# Altium PCB USB-A to 7.4V.PcbDoc
Units mm, origin at the board's own origin, x right, y up, seen from the top; angles counter-clockwise.
Board outline 28.2 x 11.9 mm, 2 copper layers (Top Layer, Bottom Layer); 9 components, 5 nets, 49 pads, 29 vias.
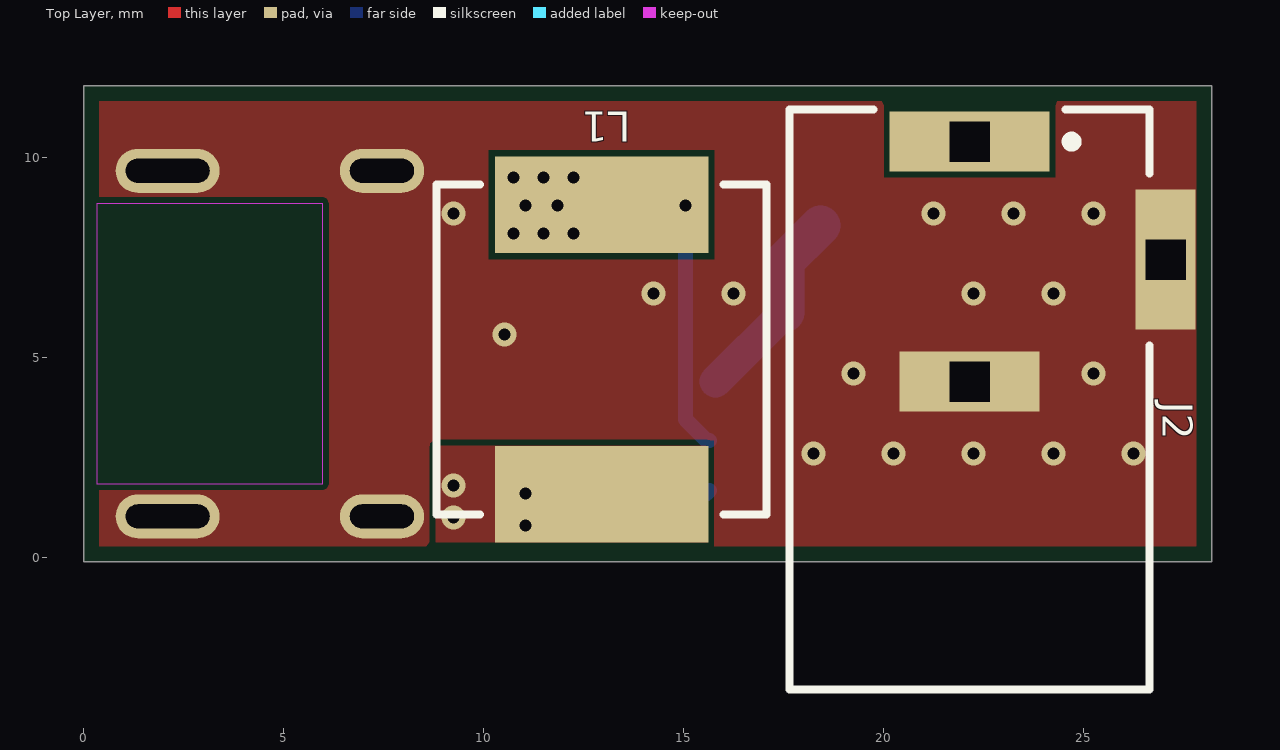
[diagram p0: Top Layer view]
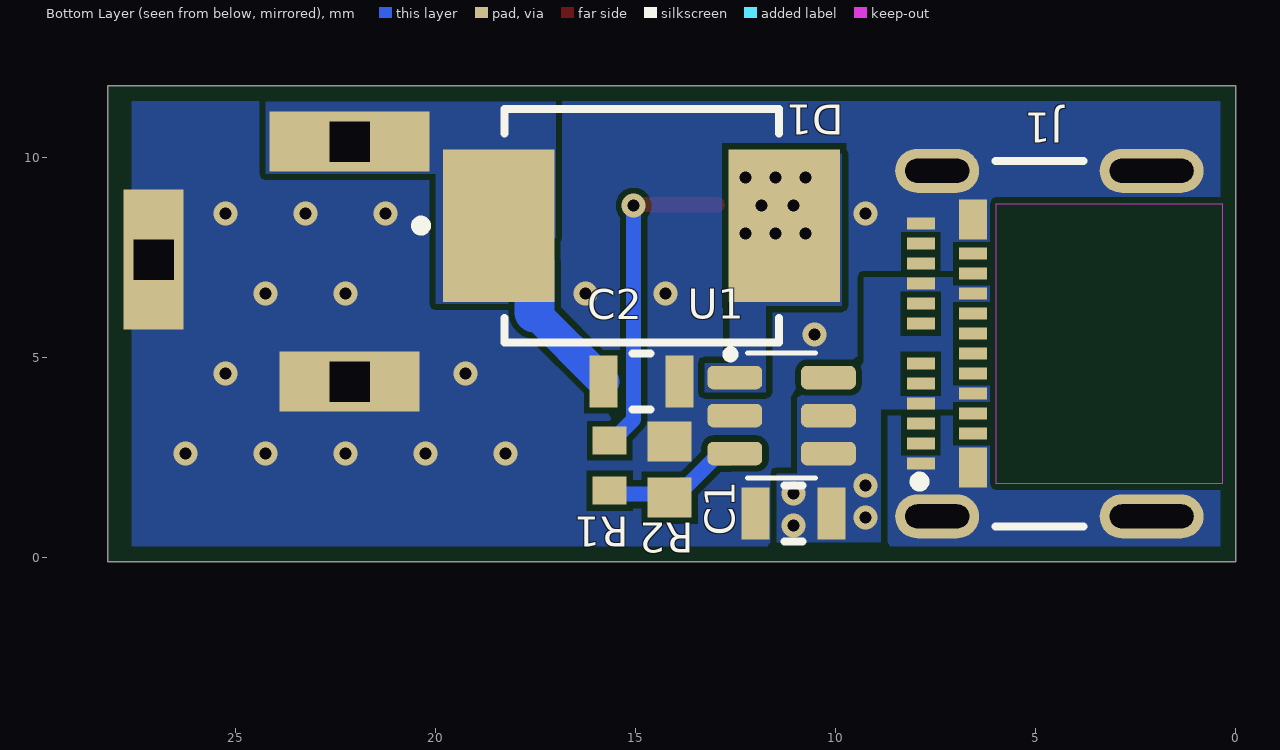
[diagram p1: Bottom Layer view, seen from below]

## Layer stack, top to bottom
Top Solder: solder mask 0.0102, Solder Resist, Dk 3.5
Top Layer: signal copper 0.0356
Dielectric 1: dielectric 0.32, FR-4, Dk 4.8
Bottom Layer: signal copper 0.0356
Bottom Solder: solder mask 0.0102, Solder Resist, Dk 3.5

## Board outline
0,-0.1 0,11.8 28.2,11.8 28.2,-0.1

## Design rules (kind name [scope] priority, off if disabled: settings)
BoardOutlineClearance [All] p1: gap=0.381 ignorepadtopadclearanceinfootprint=FALSE
Clearance [All] p1: gap=0.152 ignorepadtopadclearanceinfootprint=FALSE except(0: Arc-Hole Track-Hole SMDPad-Hole THPad-Hole Via-Hole Fill-Hole Poly-Hole Region-Hole Text-Hole)
ComponentClearance [All] p1: gap=0.025 collisioncheckmode=3 verticalgap=0.025 showdistances=FALSE
DiffPairsRouting [All] p1: maxlimit=10 minlimit=0.152 mostfreqgap=0.203 toplayer_minwidth=0.152 toplayer_maxwidth=0.381 toplayer_prefwidth=0.203 bottomlayer_minwidth=0.152 bottomlayer_maxwidth=0.381 bottomlayer_prefwidth=0.203 maxuncoupledlength=12.7
HoleSize [All] p1: absolutevalues=TRUE maxlimit=6.731 minlimit=0.3 maxpercent=80.000 minpercent=20.000
HoleToHoleClearance [All] p1: gap=0.254 allowstackedmicrovias=FALSE
MinimumAnnularRing [All] p1: minimumring=0.127
MinimumSolderMaskSliver [All] p1: minsoldermaskwidth=0
PlaneClearance [All] p1: clearance=0.254
PlaneConnect [All] p1: planeconnectstyle=Direct reliefexpansion=0.406 reliefentries=4 reliefconductorwidth=0.152 reliefairgap=0.152
PolygonConnect PolygonConnect_1 [All] p1: connectstyle=Direct reliefconductorwidth=0.254 reliefentries=4 polygonreliefangle="90 Angle" airgapwidth=0.254
RoutingCorners [All] p1: cornerstyle=45-Degree minsetback=1.25 maxsetback=1.25
RoutingVias [All] p1: holewidth=0.381 width=0.762 viastyle="Through Hole" minholewidth=0.3 minwidth=0.6 maxholewidth=2.54 maxwidth=2.896
SilkToSilkClearance [All] p1: silktosilkclearance=0
SilkToSolderMaskClearance [IsPad] p1: minsilkscreentomaskgap=0.152 clearancetoexposedcopper=TRUE
SolderMaskExpansion [All] p1: expansion=0.075 istentingtop=FALSE
Width [All] p1: maxlimit=10.16 minlimit=0.152 preferedwidth=0.203
20 further rules are at their usual default settings.

## Components (designator, comment, footprint, x,y, rotation, side; value= is the part's Value field where it differs from the comment)
C1 "GRM21BR60J226ME39L" FP-GRM21B-0_15-MFG 11.05,1.1 r0 bottom
C2 "GRM21BR60J226ME39L" FP-GRM21B-0_15-MFG 14.85,4.4 r180 bottom
D1 "MBRS4201T3G" ONSC-SMC-2-403-03_V 14.85,8.3 r180 bottom
J1 "1054500101" FP-1054500101-MFG 4.1,5.35 r90 bottom
J2 "NEB 21 R" LUMB-NEB21R_V 22.15,3.95 r0 top
L1 "IHLP3232DZER220M11" FP-IHLP-3232DZ-FP_2_413x5-MFG 12.95,5.2 r90 top
R1 "ERJ3EKF1802V" RESC1608X55X30LL15T15 15.65,2.3 r90 bottom value=18k
R2 "ERA3AEB162V" RESC1608X55X30ML20T20 14.15,2.2 r270 bottom value=1.6k
U1 "MT3608" SOT95P280X145-6N 11.35,3.55 r180 bottom

## Footprints (in the part's own frame and the unit in brackets; to place one, negate y for a bottom-side part, rotate by r counter-clockwise, add the part's x,y. Pads: shape width x height; smd on the part's side, far side on the other; paste and mask are expansions set on the pad)
FP-1054500101-MFG [mm]
  rrect100% 1.1x2.1 hole 1.6 slot 0.6 at 0 deg paste-1000 mask+0: 1(-4.32,3.36) 2(4.32,3.36)
  rrect100% 1.1x2.6 hole 2.1 slot 0.6 at 0 deg paste-1000 mask+0: 3(-4.32,-2) 4(4.32,-2)
  rect 0.3x0.7 smd paste+0 mask+0: A1(-3,3.77) A2(-2.5,3.77) A3(-2,3.77) A4(-1.5,3.77) A5(-1,3.77) A6(-0.5,3.77) A7(0.5,3.77) A8(1,3.77) A9(1.5,3.77) A10(2,3.77) A11(2.5,3.77) A12(3,3.77) B2(2.25,2.47) B3(1.75,2.47) B4(1.25,2.47) B5(0.75,2.47) B6(0.25,2.47) B7(-0.25,2.47) B8(-0.75,2.47) B9(-1.25,2.47) B10(-1.75,2.47) B11(-2.25,2.47)
  rect 1x0.7 smd paste+0 mask+0: B1(3.1,2.47) B12(-3.1,2.47)
  Keep-Out Layer region: -3.5,1.88 3.5,1.88 3.5,-3.77 -3.5,-3.77
  silkscreen extent -4.57,-0.3 4.57,3.93
FP-GRM21B-0_15-MFG [mm]
  rect 0.7x1.3 smd paste+0 mask+0: 1(-0.95,0) 2(0.95,0)
  silkscreen extent -0.23,-0.7 0.23,0.7, body extent -1,-0.63 1,0.63, height 1.4
FP-IHLP-3232DZ-FP_2_413x5-MFG [mil]
  rect 95x210 smd paste+0 mask+0: 1(-142.5,0) 2(142.5,0)
  silkscreen extent -163,-163 163,163, body extent -194,-166 194,166, height 10
LUMB-NEB21R_V [mm] "THD, 3-Leads, Body 14.5x9mm"
  rect 4x1.5 hole 1 square: 1(0,6.45)
  rect 1.5x3.5 hole 1 square: 2(4.9,3.5)
  rect 3.5x1.5 hole 1 square: 3(0,0.45)
  silkscreen extent -4.5,-7.25 4.5,7.25, body extent -4.5,-7.25 5.2,7.25, height 11
ONSC-SMC-2-403-03_V [mil] "Molded, 2-Leads, Body 6.86x5.84mm"
  rect 110x150 smd: 1(-140.49,0) 2(140.49,0)
  silkscreen extent -222,-115 135,115, body extent -135,-115 135,115, height 99
RESC1608X55X30LL15T15 [mm] "Chip Resistor, 2-Leads, Body 1.60x0.80mm, IPC High Density"
  rect 0.7x0.85 smd: 1(-0.625,0) 2(0.625,0)
  body extent -0.87,-0.48 0.87,0.48, height 0.55
RESC1608X55X30ML20T20 [mm] "Chip Resistor, 2-Leads, Body 1.60x0.80mm, IPC Low Density"
  rect 1x1.1 smd: 1(-0.7,0) 2(0.7,0)
  body extent -0.9,-0.5 0.9,0.5, height 0.55
SOT95P280X145-6N [mm]
  rrect50% 1.37x0.59 smd: 1(-1.17,0.95) 2(-1.17,0) 3(-1.17,-0.95) 4(1.17,-0.95) 5(1.17,0) 6(1.17,0.95)
  silkscreen extent -1.38,-1.57 0.85,1.63, body extent -1.45,-1.4 1.45,1.4, height 1.45

## Part data
C1 C2: library part CMP-2007-03385-2, "Chip Multilayer Ceramic Capacitors for General Purpose, 0805, 22uF, X5R, 15%, 20%, 6.3V", Capacitance=22uF, Case Code (Imperial)=0805, Case Code (Metric)=2012, Dielectric=X5R, Max Operating Temperature=85°C, Min Operating Temperature=-55°C, Package Quantity=1, Tolerance=20%, Voltage=6.3V, Case/Package=0805, Depth=1.25mm, Height=1.25mm, Lead Free="Lead Free", Length=2mm, Material=Ceramic, Mount="Surface Mount", Packaging="Tape and Reel", Radiation Hardening=No, REACH SVHC="No SVHC", Termination=SMD/SMT, Thickness=0.053inch, Voltage Rating=6.3V, Voltage Rating (DC)=6.3V, Width=0.049inch
D1: library part CMP-1051-00011-1, "200 V, 4 A Schottky Fast Soft-Recovery Power Rectifier, 2-Pin SMC, Pb-Free, Tape and Reel", Manufacturer="On Semiconductor", ComponentLink1Description="Manufacturer URL", ComponentLink1URL=http://www.onsemi.com/, ComponentLink2Description=Datasheet, ComponentLink2URL=http://www.onsemi.cn/pub_link/Collateral/MBRS4201T3-D.PDF, ComponentLink3Description="Package Specification", ComponentLink3URL=http://www.onsemi.com/pub_link/Collateral/403-03.PDF, Configuration=Single, DatasheetVersion="Rev. 5", IFSM Max (A)=100, Mounting Technology="Surface Mount", PackageDescription="2-Pin Small Molded Package, J-Bend Lead, Body 5.845 x 6.855 mm", PackageReference=SMC-2-403-03, PackageVersion="Rev. E, 08/2005", Packing="Tape and Reel", PartNumber=MBRS4201T3G, RoHS=TRUE, trr Max (ns)=35
J1: library part CMP-04767-000004-1, "CONN RCP USB3.1 TYPEC 24P SMD RA", Current Rating=0.25/1.25/5A, Manufacturer=Molex, Package=0, Temperature="-30°C to +85°C", Temperature Range High=+85°C, Temperature Range Low=-30°C, Voltage Rating=30V, Automotive=No, Category=Conn, ComponentLink2Description=Datasheet, ComponentLink2URL=https://www.molex.com/webdocs/datasheets/pdf/en-us/1054500101_IO_CONNECTORS.pdf, Conn Orientation="Right Angle", Contact Material=Gold,Nickel, Device Class L1=Connectors, Device Class L2="USB Connectors", Device Class L3=unset, Digikey Description="CONN RCP USB3.1 TYPEC 24P SMD RA", Footprint Url=https://www.molex.com/pdm_docs/sd/1054500101_sd.pdf, Height=3.44mm, Is Female=yes, Lead Free=Yes, Manufacturer Part Number=1054500101, Mouser Description="USB Shielded I/O Receptacle; Type C; Right Angle; Surface Mount; Gold over Nickel", Number Of Contacts=24, Octopart=https://octopart.com/105450-0101-molex-68082325, Pitch=0.5mm, RoHS=TRUE, Shielding=true, Usb Standard="USB 3.1"
J2: library part CMP-2000-06841-1, "Jack Socket, Body 14.5 x 9 mm, Height 11 mm, -20 to 70 degC, 3-Pin THD, RoHS, Bulk", Current Rating=3A, Manufacturer=Lumberg, Maximum Operating Temperature=+70°C, Minimum Operating Temperature=-20°C, Package Description="3-Pin Through Hole Device, Body 14.5 x 9 mm, Height 11 mm", Package Reference=NEB21R, Voltage Rating=12Vdc, Body Orientation=RightAngle, Datasheet URL=https://datasheet.ciiva.com/11720/0900766b805694d6-11720273.pdf, Datasheet Version=12/2004, Manufacturer URL=http://www.lumberg.com/, Mounting Technology=ThroughHole, Mounting Type=ThroughHole, Plug/Socket=Socket, Termination Method=Solder
L1: library part CMP-02424-000164-1, "Commercial Inductors, Low DCR Series 22uH 4.3A 94.2mΩ 20%", Case/Package=3232, Current Rating=4.3A, DC Resistance (DCR)=94.2mR, Inductance=22uH, Inductance Tolerance=20%, Max DC Current=3.3A, Max Operating Temperature=125°C, Min Operating Temperature=-55°C, Package Quantity=1, Self Resonant Frequency=8.2MHz, Test Frequency=100kHz, Core Material=Metal, Depth=8.26mm, Height=4mm, Height - Seated (Max)=0.157inch, Lead Free="Lead Free", Length=8.64mm, Military Standard=Not, Mount="Surface Mount", Number of Pins=2, Packaging="Tape and Reel", Radiation Hardening=No, RMS Current (Irms)=4.3A, Saturation Current=3.3A, Shielding=Shielded, Termination=SMD/SMT, Tolerance=20%, Width=0.322inch
R1: library part CMP-1012-00650-2, Manufacturer=Panasonic, Package=0603, Part Number=ERJ3EKF1802V
R2: library part CMP-2000-00924-1, Manufacturer=Panasonic, Part Number=ERA3AEB162V
U1: "High Efficiency 1.2MHz 2A Step Up Converter", Package=None, Availability=Unavailable, MF="{'manufacturer': u'Aerosemi Technology Co., Ltd'}", MP=MT3608, Price=None

## Via types
v1: diameter 0.6, hole 0.3, Top Layer to Bottom Layer, tented both sides, 29 vias

## Nets (pads, with @x,y where several pads share a name; then routed paths per layer and width w, separated by ;. In a path a pad name is that pad's centre, name@x,y a point inside that pad or via, vN(x,y) a via of type N, cw(c..) or ccw(c..) an arc to the next point about the centre after c; other vN are vias at no path point)
GND: C1.2 C2.2 J1.1 J1.2 J1.3 J1.4 J1.A1 J1.A12 J1.B1 J1.B12 J2.2 J2.3 R2.1 U1.2
  other v1: 18.25,2.6 20.25,2.6 22.25,2.6 24.25,2.6 26.25,2.6 19.25,4.6 25.25,4.6 10.525,5.575 14.25,6.6 16.25,6.6 22.25,6.6 24.25,6.6 9.25,8.6 21.25,8.6 23.25,8.6 25.25,8.6
NetR1_1: R1.1 R2.2 U1.3 | length 3.7
  Bottom Layer w0.381: U1.3 12.624,2.495 13.014,2.495 13.7,1.81 13.84,1.81 R2.2 14.238,1.588 15.563,1.588 R1.1
SW: D1.2 L1.2 R1.2 U1.1 | length 8.3
  Top Layer w0.381: L1.2 15.03,8.819 v1(15.05,8.8)
  Bottom Layer w0.381: v1(15.05,8.8) 15.05,3.45 15.575,2.925 R1.2
  other v1: 10.75,8.1 11.5,8.1 12.25,8.1 11.05,8.8 11.85,8.8 10.75,9.5 11.5,9.5 12.25,9.5
VBUS: C1.1 J1.A4 J1.A9 J1.B4 J1.B9 L1.1 U1.4 U1.5
  other v1: 11.05,0.8 9.25,1 11.05,1.6 9.25,1.8
VOUT: C2.1 D1.1 J2.1 | length 5
  Bottom Layer w0.8: C2.1 17.521,6.121
  Bottom Layer w1: 17.521,6.121 17.521,7.403 D1.1
pads on no net: J1.A2 J1.A3 J1.A5 J1.A6 J1.A7 J1.A8 J1.A10 J1.A11 J1.B2 J1.B3 J1.B5 J1.B6 J1.B7 J1.B8 J1.B10 J1.B11 U1.6

## Polygon pours and split planes (outlines as drawn)
VOUT on Bottom Layer "VOUT" (solid, pour order 1): 17,10.175 17,6.35 20,6.35 20,9.6 24.25,9.6 24.25,11.4 17,11.4
VBUS on Bottom Layer "Bottom Layer-VBUS" (solid, pour order 4): 10.45,0.388 11.475,0.388 11.475,2.1 10.955,2.1 10.955,4.9 9.298,4.9 9.298,7.012 6.071,7.012 6.071,3.712 8.866,3.712 8.866,0.388
GND on Bottom Layer "GND" (solid, pour order 7): -0.15,11.663 -0.15,-0.35 27.594,-0.35 27.594,11.601
SW on Bottom Layer "SW" (solid, pour order 6): 9.85,6.297 9.85,10.097 12.65,10.097 12.65,4.861 13.274,4.861 13.274,4.133 11.75,4.133 11.75,6.297
VBUS on Top Layer "VBUS" (solid, pour order 8): 8.8,2.8 8.8,0.388 15.6,0.388 15.6,2.8
GND on Top Layer "GND" (solid, pour order 9): 0,11.6 0,0 28,0 28,11.6

## Silkscreen, mask and mechanical layers (free items; w line width, h text height)
Mechanical 1:
  the board outline again, w0.1
Drill Drawing:
  drawing of 270 lines, arcs and shapes, not listed
  text "Layer" at 0.968,89.189 h1.52
  text "Name" at 11.38,89.189 h1.52
  text "Material" at 34.996,89.189 h1.52
  text "Thickness" at 56.834,89.189 h1.52
  text "Constant" at 73.34,89.189 h1.52
  text "Board Layer Stack" at 87.814,89.189 h1.52
  text "Top Overlay" at 11.38,86.141 h1.52
  text "Top Solder" at 11.38,83.093 h1.52
  text "Solder Resist" at 34.996,83.093 h1.52
  text "0.40mil" at 56.834,83.093 h1.52
  text "3.5" at 73.34,83.093 h1.52
  text "1" at 0.968,80.045 h1.52
  text "Top Layer" at 11.38,80.045 h1.52
  text "1.40mil" at 56.834,80.045 h1.52
  text "Dielectric 1" at 11.38,76.997 h1.52
  text "FR-4" at 34.996,76.997 h1.52
  text "12.60mil" at 56.834,76.997 h1.52
  text "4.8" at 73.34,76.997 h1.52
  text "2" at 0.968,73.949 h1.52
  text "Bottom Layer" at 11.38,73.949 h1.52
  text "1.40mil" at 56.834,73.949 h1.52
  text "Bottom Solder" at 11.38,70.901 h1.52
  text "Solder Resist" at 34.996,70.901 h1.52
  text "0.40mil" at 56.834,70.901 h1.52
  text "3.5" at 73.34,70.901 h1.52
  text "Bottom Overlay" at 11.38,67.853 h1.52
  text "Symbol" at 1.676,61.945 h1.83
  text "Count" at 14.526,61.945 h1.83
  text "Hole Size" at 28.238,61.945 h1.83
  text "Plated" at 55.916,61.945 h1.83
  text "Hole Type" at 68.765,61.945 h1.83
  text "Drill Layer Pair" at 87.404,61.945 h1.83
  text "Via/Pad" at 125.493,61.945 h1.83
  text "Pad Shape" at 140.475,61.945 h1.83
  text "Template" at 168.153,61.945 h1.83
  text "29" at 14.526,58.135 h1.52
  text "0.300mm (11.81mil)" at 28.238,58.135 h1.52
  text "PTH" at 55.916,58.135 h1.52
  text "Round" at 68.765,58.135 h1.52
  text "Top Layer - Bottom Layer" at 87.404,58.135 h1.52
  text "Via" at 125.493,58.135 h1.52
  text "Rounded" at 140.475,58.135 h1.52
  text "(Mixed)" at 168.153,58.135 h1.52
  text "2" at 14.526,54.325 h1.52
  text "1.000mm (39.37mil)" at 28.238,54.325 h1.52
  text "PTH" at 55.916,54.325 h1.52
  text "Rectangle" at 68.765,54.325 h1.52
  text "Top Layer - Bottom Layer" at 87.404,54.325 h1.52
  text "Pad" at 125.493,54.325 h1.52
  text "Rectangle" at 140.475,54.325 h1.52
  text "r350_150h100_300" at 168.153,54.325 h1.52
  text "1" at 14.526,50.515 h1.52
  text "1.000mm (39.37mil)" at 28.238,50.515 h1.52
  text "PTH" at 55.916,50.515 h1.52
  text "Rectangle" at 68.765,50.515 h1.52
  text "Top Layer - Bottom Layer" at 87.404,50.515 h1.52
  text "Pad" at 125.493,50.515 h1.52
  text "Rectangle" at 140.475,50.515 h1.52
  text "r400_150h100_350" at 168.153,50.515 h1.52
  text "2" at 14.526,46.705 h1.52
  text "1.600mm (62.99mil)" at 28.238,46.705 h1.52
  text "PTH" at 55.916,46.705 h1.52
  text "Slot" at 68.765,46.705 h1.52
  text "Top Layer - Bottom Layer" at 87.404,46.705 h1.52
  text "Pad" at 125.493,46.705 h1.52
  text "Rounded Rectangle" at 140.475,46.705 h1.52
  text "r110_210h160_60r100m110_210p-1_-1" at 168.153,46.705 h1.52
  text "2" at 14.526,42.895 h1.52
  text "2.100mm (82.68mil)" at 28.238,42.895 h1.52
  text "PTH" at 55.916,42.895 h1.52
  text "Slot" at 68.765,42.895 h1.52
  text "Top Layer - Bottom Layer" at 87.404,42.895 h1.52
  text "Pad" at 125.493,42.895 h1.52
  text "Rounded Rectangle" at 140.475,42.895 h1.52
  text "r110_260h210_60r100m110_260p-1_-1" at 168.153,42.895 h1.52
  text "36 Total" at 14.526,39.085 h1.52
  text "Slot definitions :" at 1.676,35.403 h1.52
  text "Routed Path Length" at 27.907,35.403 h1.52
  text "= Calculated from tool start centre position to tool end centre position." at 55.915,35.403 h1.52
  text "Hole Length" at 27.907,32.863 h1.52
  text "= Routed Path Length + Tool Size = Slot length as defined in the PCB layout" at 45.504,32.863 h1.52
  text "28.2 (mm)" at 7.854,10.886 h1.52
  text "11.8 (mm)" at 31.857,-0.193 h1.52 r90